# Altium PCB DDR4_MotherboardV2.PcbDoc
Units mm, origin at the board's own origin, x right, y up, seen from the top; angles counter-clockwise.
Board outline 178.31 x 45.59 mm, 2 copper layers (Top Layer, Bottom Layer); 3 components, 28 nets, 345 pads, 1 vias.
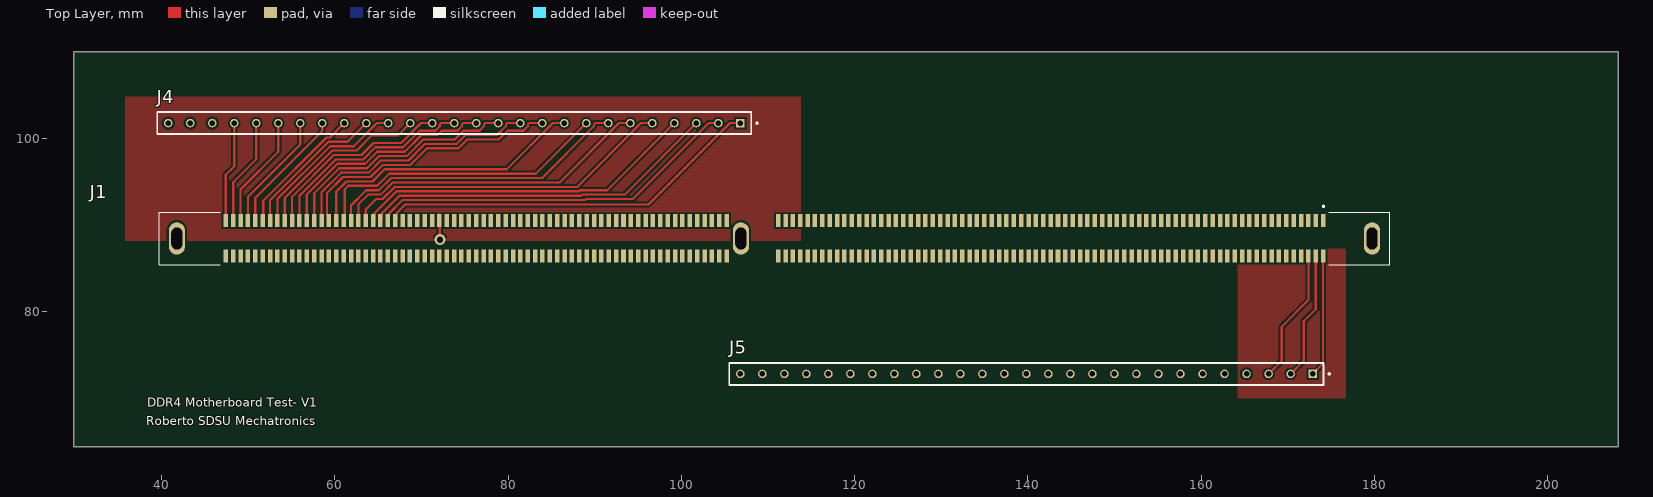
[diagram p0: Top Layer view]
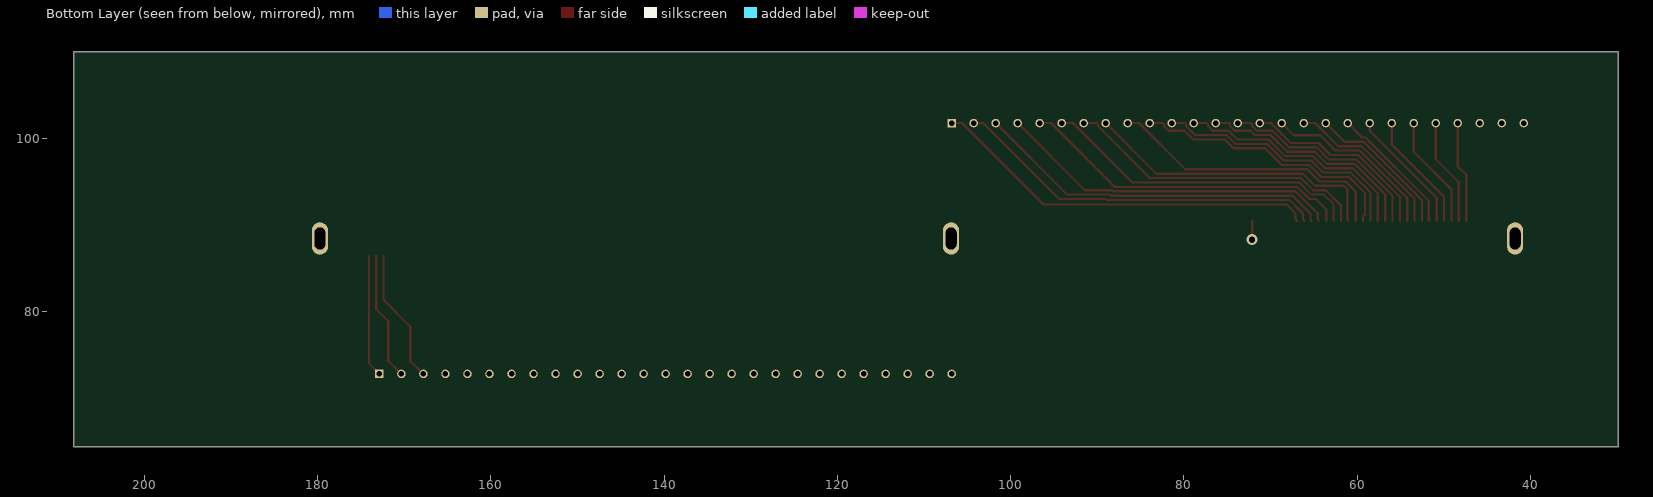
[diagram p1: Bottom Layer view, seen from below]

## Layer stack, top to bottom
Top Solder: solder mask 0.0102, Solder Resist, Dk 3.5
Top Layer: signal copper 0.0356
Dielectric 1: dielectric 0.32, FR-4, Dk 4.8
Bottom Layer: signal copper 0.0356
Bottom Solder: solder mask 0.0102, Solder Resist, Dk 3.5

## Board outline
29.845,64.389 29.845,109.982 208.153,109.982 208.153,64.389

## Design rules (kind name [scope] priority, off if disabled: settings)
Clearance [All] p1: gap=0.254 ignorepadtopadclearanceinfootprint=FALSE except(0: Arc-Hole Track-Hole SMDPad-Hole THPad-Hole Via-Hole Fill-Hole Poly-Hole Region-Hole Text-Hole)
MinimumSolderMaskSliver [All] p1: minsoldermaskwidth=0.05
PolygonConnect [All] p1: connectstyle=Relief reliefconductorwidth=0.254 reliefentries=4 polygonreliefangle="90 Angle" airgapwidth=0.254
RoomDefinition DDR4_MotherboardV2 [InComponentClass('DDR4_MotherboardV2')] p1: confinementstyle=ConfineIn formatcopy=TRUE lockcomponents=FALSE outline 192.357,76.454 192.357,103.886 30.813,103.886 30.813,76.454
RoutingVias [All] p1: holewidth=0.711 width=1.27 viastyle="Through Hole" minholewidth=0.711 minwidth=1.27 maxholewidth=0.711 maxwidth=1.27
SolderMaskExpansion [All] p1: expansion=0.102 istentingtop=FALSE
Width [All] p1: maxlimit=0.254 minlimit=0.254 preferedwidth=0.254
29 further rules are at their usual default settings.

## Components (designator, comment, footprint, x,y, rotation, side; value= is the part's Value field where it differs from the comment)
J1 "DDR504212001M" AMPHENOL_DDR504212001M 110.743,88.41 r180 top
J4 "TS-127-G-AA" SAMTEC_TS-127-G-AA 73.787,101.727 r180 top
J5 "TS-127-G-AA" SAMTEC_TS-127-G-AA 139.827,72.771 r180 top

## Footprints (in the part's own frame and the unit in brackets; to place one, negate y for a bottom-side part, rotate by r counter-clockwise, add the part's x,y. Pads: shape width x height; smd on the part's side, far side on the other; paste and mask are expansions set on the pad)
AMPHENOL_DDR504212001M [mm]
  rect 0.52x1.5 smd: 01(-63.325,-2.05) 02(-62.475,-2.05) 03(-61.625,-2.05) 04(-60.775,-2.05) 05(-59.925,-2.05) 06(-59.075,-2.05) 07(-58.225,-2.05) 08(-57.375,-2.05) 09(-56.525,-2.05) 10(-55.675,-2.05) 11(-54.825,-2.05) 12(-53.975,-2.05) 13(-53.125,-2.05) 14(-52.275,-2.05) 15(-51.425,-2.05) 16(-50.575,-2.05) 17(-49.725,-2.05) 18(-48.875,-2.05) 19(-48.025,-2.05) 20(-47.175,-2.05) 21(-46.325,-2.05) 22(-45.475,-2.05) 23(-44.625,-2.05) 24(-43.775,-2.05) 25(-42.925,-2.05) 26(-42.075,-2.05) 27(-41.225,-2.05) 28(-40.375,-2.05) 29(-39.525,-2.05) 30(-38.675,-2.05) 31(-37.825,-2.05) 32(-36.975,-2.05) 33(-36.125,-2.05) 34(-35.275,-2.05) 35(-34.425,-2.05) 36(-33.575,-2.05) 37(-32.725,-2.05) 38(-31.875,-2.05) 39(-31.025,-2.05) 40(-30.175,-2.05) 41(-29.325,-2.05) 42(-28.475,-2.05) 43(-27.625,-2.05) 44(-26.775,-2.05) 45(-25.925,-2.05) 46(-25.075,-2.05) 47(-24.225,-2.05) 48(-23.375,-2.05) 49(-22.525,-2.05) 50(-21.675,-2.05) 51(-20.825,-2.05) 52(-19.975,-2.05) 53(-19.125,-2.05) 54(-18.275,-2.05) 55(-17.425,-2.05) 56(-16.575,-2.05) 57(-15.725,-2.05) 58(-14.875,-2.05) 59(-14.025,-2.05) 60(-13.175,-2.05) 61(-12.325,-2.05) 62(-11.475,-2.05) 63(-10.625,-2.05) 64(-9.775,-2.05) 65(-8.925,-2.05) 66(-8.075,-2.05) 67(-7.225,-2.05) 68(-6.375,-2.05) 69(-5.525,-2.05) 70(-4.675,-2.05) 71(-3.825,-2.05) 72(-2.975,-2.05) 73(-2.125,-2.05) 74(-1.275,-2.05) 75(-0.425,-2.05) 76(5.525,-2.05) 77(6.375,-2.05) 78(7.225,-2.05) 79(8.075,-2.05) 80(8.925,-2.05) 81(9.775,-2.05) 82(10.625,-2.05) 83(11.475,-2.05) 84(12.325,-2.05) 85(13.175,-2.05) 86(14.025,-2.05) 87(14.875,-2.05) 88(15.725,-2.05) 89(16.575,-2.05) 90(17.425,-2.05) 91(18.275,-2.05) 92(19.125,-2.05) 93(19.975,-2.05) 94(20.825,-2.05) 95(21.675,-2.05) 96(22.525,-2.05) 97(23.375,-2.05) 98(24.225,-2.05) 99(25.075,-2.05) 100(25.925,-2.05) 101(26.775,-2.05) 102(27.625,-2.05) 103(28.475,-2.05) 104(29.325,-2.05) 105(30.175,-2.05) 106(31.025,-2.05) 107(31.875,-2.05) 108(32.725,-2.05) 109(33.575,-2.05) 110(34.425,-2.05) 111(35.275,-2.05) 112(36.125,-2.05) 113(36.975,-2.05) 114(37.825,-2.05) 115(38.675,-2.05) 116(39.525,-2.05) 117(40.375,-2.05) 118(41.225,-2.05) 119(42.075,-2.05) 120(42.925,-2.05) 121(43.775,-2.05) 122(44.625,-2.05) 123(45.475,-2.05) 124(46.325,-2.05) 125(47.175,-2.05) 126(48.025,-2.05) 127(48.875,-2.05) 128(49.725,-2.05) 129(50.575,-2.05) 130(51.425,-2.05) 131(52.275,-2.05) 132(53.125,-2.05) 133(53.975,-2.05) 134(54.825,-2.05) 135(55.675,-2.05) 136(56.525,-2.05) 137(57.375,-2.05) 138(58.225,-2.05) 139(59.075,-2.05) 140(59.925,-2.05) 141(60.775,-2.05) 142(61.625,-2.05) 143(62.475,-2.05) 144(63.325,-2.05) 145(-63.325,2.05) 146(-62.475,2.05) 147(-61.625,2.05) 148(-60.775,2.05) 149(-59.925,2.05) 150(-59.075,2.05) 151(-58.225,2.05) 152(-57.375,2.05) 153(-56.525,2.05) 154(-55.675,2.05) 155(-54.825,2.05) 156(-53.975,2.05) 157(-53.125,2.05) 158(-52.275,2.05) 159(-51.425,2.05) 160(-50.575,2.05) 161(-49.725,2.05) 162(-48.875,2.05) 163(-48.025,2.05) 164(-47.175,2.05) 165(-46.325,2.05) 166(-45.475,2.05) 167(-44.625,2.05) 168(-43.775,2.05) 169(-42.925,2.05) 170(-42.075,2.05) 171(-41.225,2.05) 172(-40.375,2.05) 173(-39.525,2.05) 174(-38.675,2.05) 175(-37.825,2.05) 176(-36.975,2.05) 177(-36.125,2.05) 178(-35.275,2.05) 179(-34.425,2.05) 180(-33.575,2.05) 181(-32.725,2.05) 182(-31.875,2.05) 183(-31.025,2.05) 184(-30.175,2.05) 185(-29.325,2.05) 186(-28.475,2.05) 187(-27.625,2.05) 188(-26.775,2.05) 189(-25.925,2.05) 190(-25.075,2.05) 191(-24.225,2.05) 192(-23.375,2.05) 193(-22.525,2.05) 194(-21.675,2.05) 195(-20.825,2.05) 196(-19.975,2.05) 197(-19.125,2.05) 198(-18.275,2.05) 199(-17.425,2.05) 200(-16.575,2.05) 201(-15.725,2.05) 202(-14.875,2.05) 203(-14.025,2.05) 204(-13.175,2.05) 205(-12.325,2.05) 206(-11.475,2.05) 207(-10.625,2.05) 208(-9.775,2.05) 209(-8.925,2.05) 210(-8.075,2.05) 211(-7.225,2.05) 212(-6.375,2.05) 213(-5.525,2.05) 214(-4.675,2.05) 215(-3.825,2.05) 216(-2.975,2.05) 217(-2.125,2.05) 218(-1.275,2.05) 219(-0.425,2.05) 220(5.525,2.05) 221(6.375,2.05) 222(7.225,2.05) 223(8.075,2.05) 224(8.925,2.05) 225(9.775,2.05) 226(10.625,2.05) 227(11.475,2.05) 228(12.325,2.05) 229(13.175,2.05) 230(14.025,2.05) 231(14.875,2.05) 232(15.725,2.05) 233(16.575,2.05) 234(17.425,2.05) 235(18.275,2.05) 236(19.125,2.05) 237(19.975,2.05) 238(20.825,2.05) 239(21.675,2.05) 240(22.525,2.05) 241(23.375,2.05) 242(24.225,2.05) 243(25.075,2.05) 244(25.925,2.05) 245(26.775,2.05) 246(27.625,2.05) 247(28.475,2.05) 248(29.325,2.05) 249(30.175,2.05) 250(31.025,2.05) 251(31.875,2.05) 252(32.725,2.05) 253(33.575,2.05) 254(34.425,2.05) 255(35.275,2.05) 256(36.125,2.05) 257(36.975,2.05) 258(37.825,2.05) 259(38.675,2.05) 260(39.525,2.05) 261(40.375,2.05) 262(41.225,2.05) 263(42.075,2.05) 264(42.925,2.05) 265(43.775,2.05) 266(44.625,2.05) 267(45.475,2.05) 268(46.325,2.05) 269(47.175,2.05) 270(48.025,2.05) 271(48.875,2.05) 272(49.725,2.05) 273(50.575,2.05) 274(51.425,2.05) 275(52.275,2.05) 276(53.125,2.05) 277(53.975,2.05) 278(54.825,2.05) 279(55.675,2.05) 280(56.525,2.05) 281(57.375,2.05) 282(58.225,2.05) 283(59.075,2.05) 284(59.925,2.05) 285(60.775,2.05) 286(61.625,2.05) 287(62.475,2.05) 288(63.325,2.05)
  oval 1.875x3.75 hole 1.25 slot 2.53 at 90 deg: S1(-68.975,0) S2(3.875,0) S3(68.975,0)
  silkscreen extent -71,-3.8 71,3.05, body extent -128.92,3.43 14.48,9.54, height 19.96
SAMTEC_TS-127-G-AA [mm]
  rect 0.985x0.985 hole 0.635: 01(-33.02,0)
  round 0.985 hole 0.635: 02(-30.48,0) 03(-27.94,0) 04(-25.4,0) 05(-22.86,0) 06(-20.32,0) 07(-17.78,0) 08(-15.24,0) 09(-12.7,0) 10(-10.16,0) 11(-7.62,0) 12(-5.08,0) 13(-2.54,0) 14(0,0) 15(2.54,0) 16(5.08,0) 17(7.62,0) 18(10.16,0) 19(12.7,0) 20(15.24,0) 21(17.78,0) 22(20.32,0) 23(22.86,0) 24(25.4,0) 25(27.94,0) 26(30.48,0) 27(33.02,0)
  silkscreen extent -35.04,-1.27 34.29,1.27

## Part data
J1: library part CMP-033-000000-1, "DDR5 Memory Module Sockets, Storage and Server System, Vertical, Surface Mount, 288 Position, 0.85mm (0.0335in) pitch.", Package=None, Availability="In Stock", Check_prices=https://www.snapeda.com/parts/DDR504212001M/Amphenol/view-part/?ref=eda, Component Type=Standard, Design Item ID=DDR504212001M, MF="Amphenol FCI", MP=DDR504212001M, Pin Count=291, Price=None, SnapEDA_Link=https://www.snapeda.com/parts/DDR504212001M/Amphenol/view-part/?ref=snap, Source=DDR504212001M.SchLib
J4 J5: library part CMP-029-000000-1, "Connector Header position", Package=None, Availability="In Stock", Check_prices=https://www.snapeda.com/parts/TS-127-G-AA/Samtec/view-part/?ref=eda, Component Type=Standard, Design Item ID=TS-127-G-AA, MF=Samtec, MP=TS-127-G-AA, Pin Count=27, Price=None, Purchase-URL=https://pricing.snapeda.com/search/part/TS-127-G-AA/?ref=eda, SnapEDA_Link=https://www.snapeda.com/parts/TS-127-G-AA/Samtec/view-part/?ref=snap, Source=TS-127-G-AA.SchLib

## Via types
v1: diameter 1.27, hole 0.711, Top Layer to Bottom Layer, 1 vias

## Nets (pads, with @x,y where several pads share a name; then routed paths per layer and width w, separated by ;. In a path a pad name is that pad's centre, name@x,y a point inside that pad or via, vN(x,y) a via of type N, cw(c..) or ccw(c..) an arc to the next point about the centre after c; other vN are vias at no path point)
GND: J1.115 | length 2.2
  Top Layer w0.254: J1.115 72.102,90.426 72.102,88.299 v1(72.136,88.265)
I1: J1.121 J4.01 | length 44.9
  Top Layer w0.254: J1.121 67.101,90.593 67.101,91.292 68.138,92.329 96.212,92.329 105.61,101.727 J4.01
I2: J1.122 J4.02 | length 43.2
  Top Layer w0.254: J1.122 66.251,90.593 66.251,91.292 67.796,92.837 88.9,92.837 89.027,92.964 94.391,92.964 103.154,101.727 J4.02
I3: J1.123 J4.03 | length 41.5
  Top Layer w0.254: J1.123 65.401,90.593 65.401,91.292 67.454,93.345 88.397,93.345 88.524,93.472 93.472,93.472 J4.03
I4: J1.124 J4.04 | length 39.8
  Top Layer w0.254: J1.124 64.551,90.593 64.551,91.292 67.112,93.853 88.187,93.853 88.314,93.98 91.44,93.98 J4.04
I5: J1.125 J4.05 | length 38.5
  Top Layer w0.254: J1.125 63.568,91.762 64.77,92.964 65.505,92.964 66.902,94.361 87.976,94.361 95.342,101.727 J4.05
I6: J1.126 J4.06 | length 37.2
  Top Layer w0.254: J1.126 62.718,92.349 63.841,93.472 65.294,93.472 66.691,94.869 85.944,94.869 92.802,101.727 J4.06
I7: J1.127 J4.07 | length 35.5
  Top Layer w0.254: J1.127 61.868,92.217 63.631,93.98 65.084,93.98 66.481,95.377 83.912,95.377 89.901,101.365 89.901,101.578 90.049,101.727 J4.07
I8: J1.128 J4.08 | length 34.7
  Top Layer w0.254: J1.128 61.151,90.593 61.151,94.085 61.554,94.488 64.874,94.488 66.271,95.885 83.185,95.885 J4.08
I9: J1.129 J4.09 | length 33
  Top Layer w0.254: J1.129 60.168,93.821 61.343,94.996 64.336,94.996 65.733,96.393 79.848,96.393 85.182,101.727 J4.09
I10: J1.130 J4.10 | length 31.6
  Top Layer w0.254: J1.130 59.318,90.95 59.109,91.159 59.109,93.672 60.941,95.504 64.126,95.504 65.523,96.901 68.708,96.901 70.629,98.821 74.272,98.821 75.273,99.822 75.288,99.837 78.931,99.837 79.947,100.853 81.769,100.853 82.281,101.365 82.281,101.578 82.429,101.727 J4.10
I11: J1.131 J4.11 | length 29.7
  Top Layer w0.254: J1.131 58.468,93.75 60.73,96.012 63.916,96.012 65.313,97.409 68.498,97.409 70.418,99.329 74.062,99.329 75.062,100.33 75.078,100.345 78.721,100.345 79.741,101.365 79.741,101.578 79.889,101.727 J4.11
I12: J1.132 J4.12 | length 27.9
  Top Layer w0.254: J1.132 57.618,93.618 60.52,96.52 63.705,96.52 65.102,97.917 68.288,97.917 70.208,99.837 73.851,99.837 74.852,100.838 74.867,100.853 76.689,100.853 77.201,101.365 77.201,101.578 77.349,101.727 J4.12
I13: J1.133 J4.13 | length 26.1
  Top Layer w0.254: J1.133 56.768,93.487 60.309,97.028 63.495,97.028 64.892,98.425 68.077,98.425 69.998,100.345 71.819,100.345 72.327,100.853 74.149,100.853 74.661,101.365 74.661,101.578 74.809,101.727 J4.13
I14: J1.134 J4.14 | length 24.4
  Top Layer w0.254: J1.134 55.918,93.355 60.099,97.536 63.284,97.536 64.681,98.933 67.867,98.933 69.787,100.853 71.609,100.853 72.121,101.365 72.121,101.578 72.269,101.727 J4.14
I15: J1.135 J4.15 | length 22.5
  Top Layer w0.254: J1.135 55.068,93.224 59.888,98.044 63.074,98.044 64.471,99.441 67.656,99.441 69.942,101.727 J4.15
I16: J1.136 J4.16 | length 20.7
  Top Layer w0.254: J1.136 54.218,93.092 59.678,98.552 62.506,98.552 64.278,100.324 67.304,100.324 J4.16
I17: J1.137 J4.17 | length 18.9
  Top Layer w0.254: J1.137 53.368,92.96 59.468,99.06 62.195,99.06 64.862,101.727 J4.17
I18: J1.138 J4.18 | length 17.2
  Top Layer w0.254: J1.138 52.518,92.829 59.257,99.568 61.468,99.568 J4.18
I19: J1.139 J4.19 | length 15.4
  Top Layer w0.254: J1.139 51.729,90.521 51.729,92.758 59.047,100.076 59.436,100.076 J4.19
I20: J1.140 J4.20 | length 14.5
  Top Layer w0.254: J1.140 50.818,93.088 58.547,100.817 J4.20
I21: J1.141 J4.21 | length 13.8
  Top Layer w0.254: J1.141 49.968,93.22 56.007,99.259 J4.21
I22: J1.142 J4.22 | length 13.1
  Top Layer w0.254: J1.142 49.118,94.065 53.467,98.414 J4.22
I23: J1.143 J4.23 | length 12.4
  Top Layer w0.254: J1.143 48.268,94.91 50.927,97.569 J4.23
I24: J1.144 J4.24 | length 11.7
  Top Layer w0.254: J1.144 47.418,95.755 48.387,96.724 J4.24
I25: J1.145 J5.01 | length 14.1
  Top Layer w0.254: J5.01 174.068,73.992 J1.145
I26: J1.146 J5.02 | length 14.8
  Top Layer w0.254: J5.02 171.831,74.295 171.831,78.853 173.218,80.24 J1.146
I27: J1.147 J5.03 | length 15.5
  Top Layer w0.254: J5.03 169.291,74.295 169.291,78.232 172.368,81.309 J1.147
pads on no net: J1.01 J1.02 J1.03 J1.04 J1.05 J1.06 J1.07 J1.08 J1.09 J1.10 J1.11 J1.12 J1.13 J1.14 J1.15 J1.16 J1.17 J1.18 J1.19 J1.20 J1.21 J1.22 J1.23 J1.24 J1.25 J1.26 J1.27 J1.28 J1.29 J1.30 J1.31 J1.32 J1.33 J1.34 J1.35 J1.36 J1.37 J1.38 J1.39 J1.40 J1.41 J1.42 J1.43 J1.44 J1.45 J1.46 J1.47 J1.48 J1.49 J1.50 J1.51 J1.52 J1.53 J1.54 J1.55 J1.56 J1.57 J1.58 J1.59 J1.60 J1.61 J1.62 J1.63 J1.64 J1.65 J1.66 J1.67 J1.68 J1.69 J1.70 J1.71 J1.72 J1.73 J1.74 J1.75 J1.76 J1.77 J1.78 J1.79 J1.80 J1.81 J1.82 J1.83 J1.84 J1.85 J1.86 J1.87 J1.88 J1.89 J1.90 J1.91 J1.92 J1.93 J1.94 J1.95 J1.96 J1.97 J1.98 J1.99 J1.100 J1.101 J1.102 J1.103 J1.104 J1.105 J1.106 J1.107 J1.108 J1.109 J1.110 J1.111 J1.112 J1.113 J1.114 J1.116 J1.117 J1.118 J1.119 J1.120 J1.148 J1.149 J1.150 J1.151 J1.152 J1.153 J1.154 J1.155 J1.156 J1.157 J1.158 J1.159 J1.160 J1.161 J1.162 J1.163 J1.164 J1.165 J1.166 J1.167 J1.168 J1.169 J1.170 J1.171 J1.172 J1.173 J1.174 J1.175 J1.176 J1.177 J1.178 J1.179 J1.180 J1.181 J1.182 J1.183 J1.184 J1.185 J1.186 J1.187 J1.188 J1.189 J1.190 J1.191 J1.192 J1.193 J1.194 J1.195 J1.196 J1.197 J1.198 J1.199 J1.200 J1.201 J1.202 J1.203 J1.204 J1.205 J1.206 J1.207 J1.208 J1.209 J1.210 J1.211 J1.212 J1.213 J1.214 J1.215 J1.216 J1.217 J1.218 J1.219 J1.220 J1.221 J1.222 J1.223 J1.224 J1.225 J1.226 J1.227 J1.228 J1.229 J1.230 J1.231 J1.232 J1.233 J1.234 J1.235 J1.236 J1.237 J1.238 J1.239 J1.240 J1.241 J1.242 J1.243 J1.244 J1.245 J1.246 J1.247 J1.248 J1.249 J1.250 J1.251 J1.252 J1.253 J1.254 J1.255 J1.256 J1.257 J1.258 J1.259 J1.260 J1.261 J1.262 J1.263 J1.264 J1.265 J1.266 J1.267 J1.268 J1.269 J1.270 J1.271 J1.272 J1.273 J1.274 J1.275 J1.276 J1.277 J1.278 J1.279 J1.280 J1.281 J1.282 J1.283 J1.284 J1.285 J1.286 J1.287 J1.288 J1.S1 J1.S2 J1.S3 J4.25 J4.26 J4.27 J5.04 J5.05 J5.06 J5.07 J5.08 J5.09 J5.10 J5.11 J5.12 J5.13 J5.14 J5.15 J5.16 J5.17 J5.18 J5.19 J5.20 J5.21 J5.22 J5.23 J5.24 J5.25 J5.26 J5.27

## Polygon pours and split planes (outlines as drawn)
GND on Top Layer "GND_L01_P001" (solid, pour order 1): 176.657,87.249 176.657,69.977 164.211,69.977 164.211,87.249
GND on Top Layer "GND_L01_P000" (solid, pour order 0): 35.814,104.775 113.792,104.775 113.792,88.138 35.814,88.138

## Silkscreen, mask and mechanical layers (free items; w line width, h text height)
Top Overlay:
  text "DDR4 Motherboard Test- V1" at 38.354,68.961 h1
  text "Roberto SDSU Mechatronics" at 38.24,66.843 h1
Mechanical 1:
  the board outline again, w0.254